# EAGLE board LEDCLOCK (EAGLE 7.0.0)
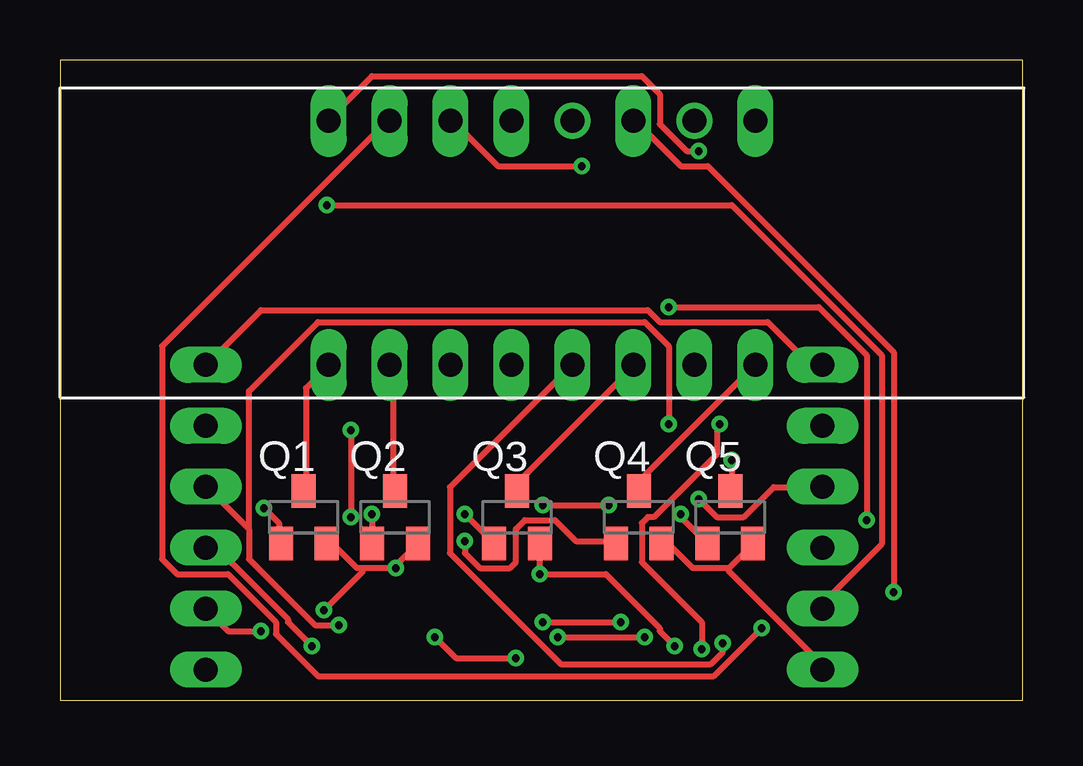
[diagram p0: board, top side]
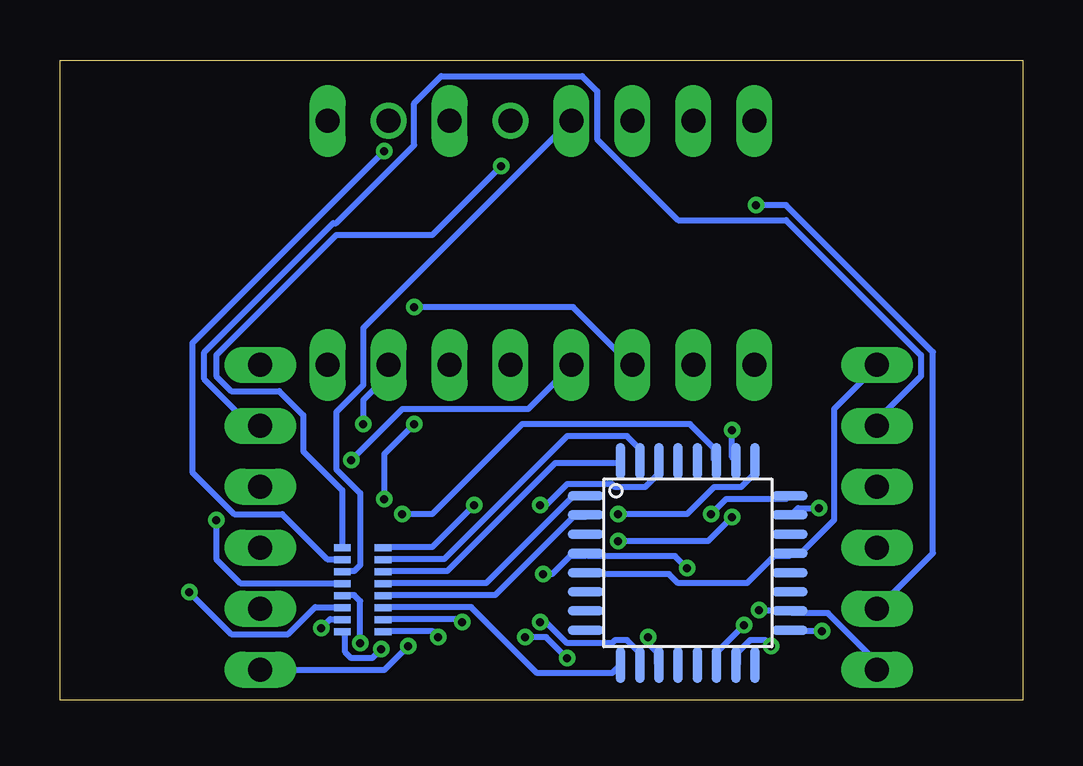
[diagram p1: board, bottom side, seen from below]

Size 40.14 x 26.67 mm. Coordinates in mm from the lower left corner, seen from the top.
Outline: 0,0 40.14,0 40.14,26.67 0,26.67 0,0
Copper layers (1*16): Top 0.0356mm / dielectric 1.5011mm / Bottom 0.0356mm
Design rules "LaenPCBOrder *": minimum track width 10mil, minimum drill 13mil, track to track 6mil, track to pad 6mil, pad to pad 6mil, via to via 6mil, smd to smd 6mil, copper to edge 15mil, drill to drill 6mil, minimum pad ring 7mil, minimum via ring 7mil, stop-mask expansion 3mil, vias tented up to drill 0mil, thermal gap 10mil

## Footprints (pad centres in the part's own frame; a part is rotated, then mirrored left to right if it is on the bottom)
SOT23-BEC = smd 1 x 1.4: B -0.95,-1.1; C 0,1.1; E 0.95,-1.1
LEDCLOCK = drill 1 long: 1 -8.89,-5.08; 2 -6.35,-5.08; 3 -3.81,-5.08; 4 -1.27,-5.08; 5 1.27,-5.08; 6 3.81,-5.08; 7 6.35,-5.08; 8 8.89,-5.08; 9 8.89,5.08; 11 3.81,5.08; 13 -1.27,5.08; 14 -3.81,5.08; 15 -6.35,5.08; 16 -8.89,5.08
DIP1X6MALE = drill 1 long: 1 -6.35,0; 2 -3.81,0; 3 -1.27,0; 4 1.27,0; 5 3.81,0; 6 6.35,0
RES_ARRAY = smd 0.7 x 0.3: 1R 1.7,3.5; 2R 1.7,3; 3R 1.7,2.5; 4R 1.7,2; 5R 1.7,1.5; 6R 1.7,1; 7R 1.7,0.5; 8R 1.7,0; R1 0,3.5; R2 0,3; R3 0,2.5; R4 0,2; R5 0,1.5; R6 0,1; R7 0,0.5; R8 0,0
ATTINY48 = smd 1.5 x 0.406: AGND 4.25,0.4; AVCC 4.25,-2; GND -4.25,-0.4; PA0 4.25,-1.2; PA1 4.25,1.2; PA2 -4.25,1.2; PA3 -4.25,-1.2; PB5 4.25,-2.8; PB6 -4.25,-2; PB7 -4.25,-2.8; PC0 4.25,2; PC1 4.25,2.8; PC7 4.25,-0.4; PD3 -4.25,2.8; PD4 -4.25,2; VCC -4.25,0.4 | smd 0.406 x 1.5: PB0 -0.4,-4.25; PB1 0.4,-4.25; PB2 1.2,-4.25; PB3 2,-4.25; PB4 2.8,-4.25; PC2 2.8,4.25; PC3 2,4.25; PC4 1.2,4.25; PC5 0.4,4.25; PC6 -0.4,4.25; PD0 -1.2,4.25; PD1 -2,4.25; PD2 -2.8,4.25; PD5 -2.8,-4.25; PD6 -2,-4.25; PD7 -1.2,-4.25

## Placement (x,y rotation side)
Q1  MMBT2907ALT1SMD  [SOT23-BEC]  10.16,7.62 0 top
Q2  MMBT2907ALT1SMD  [SOT23-BEC]  13.97,7.62 0 top
Q3  MMBT2907ALT1SMD  [SOT23-BEC]  19.05,7.62 0 top
Q4  MMBT2907ALT1SMD  [SOT23-BEC]  24.13,7.62 0 top
Q5  MMBT2907ALT1SMD  [SOT23-BEC]  27.94,7.62 0 top
U$1  LEDCLOCK  [LEDCLOCK]  20.09,19.05 0 top
U$2  DIP1X6MALE  [DIP1X6MALE]  6.08,7.62 90 top
U$3  RES_ARRAY  [RES_ARRAY]  26.67,6.35 180 bottom
U$4  DIP1X6MALE  [DIP1X6MALE]  31.79,7.62 90 top
U$5  ATTINY48  [ATTINY48]  13.97,5.71 0 bottom

## Library data of the parts
Q1-Q5 = transistor-pnp
U$1-U$5 = ScottSilver

## Nets
A: U$3.R8 U$5.PD0
B: U$3.R7 U$5.PD1
C: U$3.R6 U$5.PD2
CLK: U$2.2 U$4.2 U$5.PB5
D: U$3.R5 U$5.PD3
DIGIT1: Q1.B U$5.PC0
DIGIT2: Q2.B U$5.PC1
DIGIT3: Q3.B U$5.PC2
DIGIT4: Q4.B U$5.PC3
DP: U$3.R1 U$5.PD7
E: U$3.R4 U$5.PD4
F: U$3.R3 U$5.PD5
G: U$3.R2 U$5.PD6
GND: U$2.6 U$4.6 U$5.AGND U$5.GND
MISO: U$5.PB4
MOD: Q5.B U$5.PC4
MOSI: U$2.3 U$5.PB3
N$1: Q1.C U$1.1
N$2: Q2.C U$1.2
N$3: Q3.C U$1.6
N$4: Q4.C U$1.8
N$5: Q5.C U$1.4
RA: U$1.14 U$3.8R
RB: U$1.16 U$3.7R
RC: U$1.13 U$3.6R
RD: U$1.3 U$3.5R
RDP: U$1.7 U$3.1R
RE: U$1.5 U$3.4R
RESET: U$2.5 U$4.5
RF: U$1.11 U$3.3R
RG: U$1.15 U$3.2R
SS: U$2.4 U$4.4 U$5.PB2
VCC: Q1.E Q2.E Q3.E Q4.E Q5.E U$2.1 U$4.1 U$5.AVCC U$5.VCC

## Tracks (layer width: path | path; a pad name or v marks a point on that pad's centre or on a via)
A  (via drill 0.33)
  Top 0.254: v20.12,8.12 v22.88,8.12
  Bottom 0.254: v22.88,8.12 24.62,6.38 26.62,6.38 U$3.R8 | v20.12,8.12 19.88,8.12 19,9 17.12,9 17,8.88 15.75,8.88 15.25,9.38 15.25,9.88 U$5.PD0
B
  Bottom 0.254: U$3.R7 26.62,5.88 24.12,5.88 19,11 16.5,11 16,10.5 16,10 U$5.PD1
C
  Bottom 0.254: U$3.R6 26.62,5.38 24,5.38 19.5,9.88 16.88,9.88 U$5.PD2
CLK  (via drill 0.33)
  Top 0.254: v8.38,2.88 7,2.88 6.12,3.75 U$2.2 | v11.12,20.62 28,20.62 34.25,14.38 34.25,6.5 31.88,4.12 31.88,3.88 U$4.2
  Bottom 0.254: v8.38,2.88 9.62,2.88 U$5.PB5 | v11.12,20.62 9.88,20.62 3.75,14.5 3.75,6.12 6,3.88 U$2.2
D
  Bottom 0.254: U$3.R5 26.62,4.88 22.38,4.88 18.75,8.5 18.25,8.5 U$5.PD3
DIGIT1  (via drill 0.33)
  Top 0.254: v8.5,8 9.12,7.38 9.12,6.62 Q1.B
  Bottom 0.254: v8.5,8 9.38,8 9.62,7.75 U$5.PC0
DIGIT2  (via drill 0.33)
  Top 0.254: v13,7.75 13,6.62 Q2.B
  Bottom 0.254: v13,7.75 12.38,8.38 9.88,8.38 9.75,8.5 U$5.PC1
DIGIT3  (via drill 0.33)
  Top 0.254: v16.88,7.75 18,6.62 Q3.B
  Bottom 0.254: v16.88,7.75 14,7.75 12.88,8.88 11.75,8.88 11.25,9.38 11.25,9.88 U$5.PC2
DIGIT4  (via drill 0.33)
  Top 0.254: v16.88,6.62 16.88,6.12 17.5,5.5 18.75,5.5 19,5.75 19,7.12 19.38,7.5 20.62,7.5 21.5,6.62 23.12,6.62 Q4.B | v12.12,11.25 v12.12,7.62
  Bottom 0.254: v16.88,6.62 13.12,6.62 v12.12,7.62 | v12.12,11.25 12.12,10.12 12,10 U$5.PC3
DP  (via drill 0.33)
  Top 0.254: v20.75,2.62 v24.38,2.62 | v19,1.75 16.5,1.75 v15.62,2.62
  Bottom 0.254: v24.38,2.62 24.62,2.88 26.62,2.88 U$3.R1 | v20.75,2.62 19.88,2.62 v19,1.75 | v15.62,2.62 15.62,2.38 15.25,2 15.25,1.5 U$5.PD7
E
  Bottom 0.254: U$3.R4 26.62,4.38 22,4.38 18.75,7.62 18.25,7.62 U$5.PD4
F
  Bottom 0.254: U$3.R3 26.62,3.88 23,3.88 20.25,1.12 17.12,1.12 16.88,1.38 U$5.PD5
G  (via drill 0.33)
  Top 0.254: v20.12,3.25 v23.38,3.25
  Bottom 0.254: v23.38,3.25 23.5,3.38 26.62,3.38 U$3.R2 | v20.12,3.25 19.88,3.25 19,2.38 17.12,2.38 17,2.5 16.5,2.5 16,2 16,1.5 U$5.PD6
GND
  Top 0.254: U$4.6 31.75,14 31.25,14 29.5,15.75 25,15.75 24.5,16.25 8.38,16.25 6.12,14 U$2.6
  Bottom 0.254: U$2.6 6.12,13.88 7.88,12.12 7.88,7.5 9.25,6.12 9.62,6.12 U$5.AGND 9.75,6 10.38,6 11.5,4.88 14.38,4.88 14.75,5.25 18.12,5.25 U$5.GND
MOD  (via drill 0.33)
  Top 0.254: v25.88,7.75 25.88,7.62 26.88,6.62 Q5.B
  Bottom 0.254: v25.88,7.75 24.62,7.75 20.88,11.5 13.88,11.5 12.88,10.5 12.88,10 U$5.PC4
MOSI  (via drill 0.33)
  Top 0.254: v10.5,2.25 9.5,3.25 9.5,3.38 6.62,6.25 6.12,6.25 U$2.3
  Bottom 0.254: v10.5,2.25 10.75,2.5 11.38,2.5 11.88,2 11.88,1.5 U$5.PB3
N$1
  Top 0.254: Q1.C 10.25,8.75 10.25,13 11.12,13.88 U$1.1
N$2
  Top 0.254: Q2.C 13.88,8.75 13.88,13.75 13.75,13.88 U$1.2
N$3
  Top 0.254: Q3.C 19.12,8.75 19.12,9.12 23.88,13.88 U$1.6
N$4
  Top 0.254: Q4.C 24.25,8.75 24.25,9.25 28.88,13.88 U$1.8
N$5  (via drill 0.33)
  Top 0.254: v28,10 28,8.75 Q5.C
  Bottom 0.254: v28,10 25.88,12.12 20.62,12.12 18.88,13.88 U$1.4
N$6  (via drill 1)
  other vias: 21.36,24.13
N$7  (via drill 1)
  other vias: 26.44,24.13
RA  (via drill 0.33)
  Top 0.254: v21.75,22.25 18.25,22.25 16.38,24.12 U$1.14
  Bottom 0.254: v21.75,22.25 24.62,19.38 28.62,19.38 33.62,14.38 33.62,13.5 33,12.88 31,12.88 30,11.88 30,10.38 28.38,8.75 28.38,6.38 U$3.8R
RB  (via drill 0.33)
  Top 0.254: v26.62,22.88 26.12,22.88 25,24 25,25.25 24.25,26 13,26 11.25,24.25 U$1.16
  Bottom 0.254: v26.62,22.88 34.62,14.88 34.62,9.5 32.88,7.75 30.88,7.75 29,5.88 28.38,5.88 U$3.7R
RC
  Bottom 0.254: U$3.6R 28.25,5.38 27.88,5.38 27.62,5.62 27.62,8.62 28.62,9.62 28.62,12 27.5,13.12 27.5,15.5 18.88,24.12 U$1.13
RD  (via drill 0.33)
  Top 0.254: v33.62,7.5 33.62,14.38 31.62,16.38 v25.38,16.38
  Bottom 0.254: v33.62,7.5 33.62,5.88 32.62,4.88 28.38,4.88 U$3.5R | v25.38,16.38 18.75,16.38 16.38,14 U$1.3
RDP  (via drill 0.33)
  Top 0.254: v26.75,2.12 26.75,3.25 24.25,5.75 24.25,7.38 24.5,7.62 24.75,7.62 27.38,10.25 27.38,11.38 v27.5,11.5
  Bottom 0.254: v26.75,2.12 27.12,1.75 28,1.75 28.25,2 28.25,2.75 U$3.1R | v27.5,11.5 27.5,12.5 26.5,13.5 26.5,13.88 U$1.7
RE  (via drill 0.33)
  Top 0.254: v27.62,2.38 27.62,2 27.12,1.5 20.88,1.5 16.25,6.12 16.25,8.88 21.25,13.88 U$1.5
  Bottom 0.254: v27.62,2.38 27.62,4.12 27.88,4.38 28.25,4.38 U$3.4R
RESET
  Bottom 0.254: U$2.5 6,11.5 6,11.75 4.25,13.5 4.25,14.38 9.88,20 14.38,20 17.75,23.38 17.75,25.38 18.38,26 24.25,26 25.38,24.88 25.38,23.12 28.62,19.88 28.75,19.88 34.12,14.5 34.12,13.38 32.25,11.5 31.88,11.5 U$4.5
RF  (via drill 0.33)
  Top 0.254: v34.75,4.5 34.75,14.5 27,22.25 25.88,22.25 24,24.12 U$1.11
  Bottom 0.254: v34.75,4.5 33,2.75 30.62,2.75 29.5,3.88 28.38,3.88 U$3.3R
RG  (via drill 0.33)
  Top 0.254: v29.25,3 27.25,1 10.75,1 9,2.75 9,3.25 7,5.25 4.88,5.25 4.25,5.88 4.25,14.75 13.62,24.12 U$1.15
  Bottom 0.254: v29.25,3 28.88,3.38 28.38,3.38 U$3.2R
SS  (via drill 0.33)
  Top 0.254: v11.62,3.12 10.62,3.12 7.88,5.88 7.88,7.12 | 7.88,7.12 6.12,8.88 U$2.4 | v26.62,8.38 27.38,7.62 28.5,7.62 29.75,8.88 31.75,8.88 U$4.4 | v25.38,11.5 25.38,14.75 24.38,15.75 10.75,15.75 7.88,12.88 7.88,7.12
  Bottom 0.254: v11.62,3.12 12.75,2 12.75,1.5 U$5.PB2 | v26.62,8.38 26.62,10.25 v25.38,11.5
VCC  (via drill 0.33)
  Top 0.254: 27.88,5.5 26.38,5.5 25.38,6.5 25.12,6.5 Q4.E | 27.88,5.5 28.88,6.5 Q5.E | 27.88,5.5 27.88,5.38 31.88,1.38 U$4.1 | Q3.E v20,5.25 22.75,5.25 25,3 25,2.88 v25.62,2.25 | 13.88,5.5 12.62,5.5 | 12.62,5.5 12.38,5.5 11.38,6.5 11.12,6.5 Q1.E | 13.88,5.5 14.88,6.5 Q2.E | v14,5.5 13.88,5.5 | v11,3.75 12.62,5.38 12.62,5.5
  Bottom 0.254: U$2.1 6.12,1.38 6.12,1.62 8.12,3.62 9.62,3.62 U$5.AVCC 9.75,3.75 v11,3.75 | v20,5.25 19.62,5.25 18.88,6 18.25,6 U$5.VCC 18.12,6 14.5,6 v14,5.5 | v25.62,2.25 26.62,1.25 31.75,1.25 U$4.1